# Altium PCB PCB1.PcbDoc
Units mil, origin at the board's own origin, x right, y up, seen from the top; angles counter-clockwise.
Board outline 2700 x 2100 mil, 2 copper layers (Top Layer, Bottom Layer), stack 62.8 mil thick; 14 components, 31 nets, 60 pads, 19 vias.
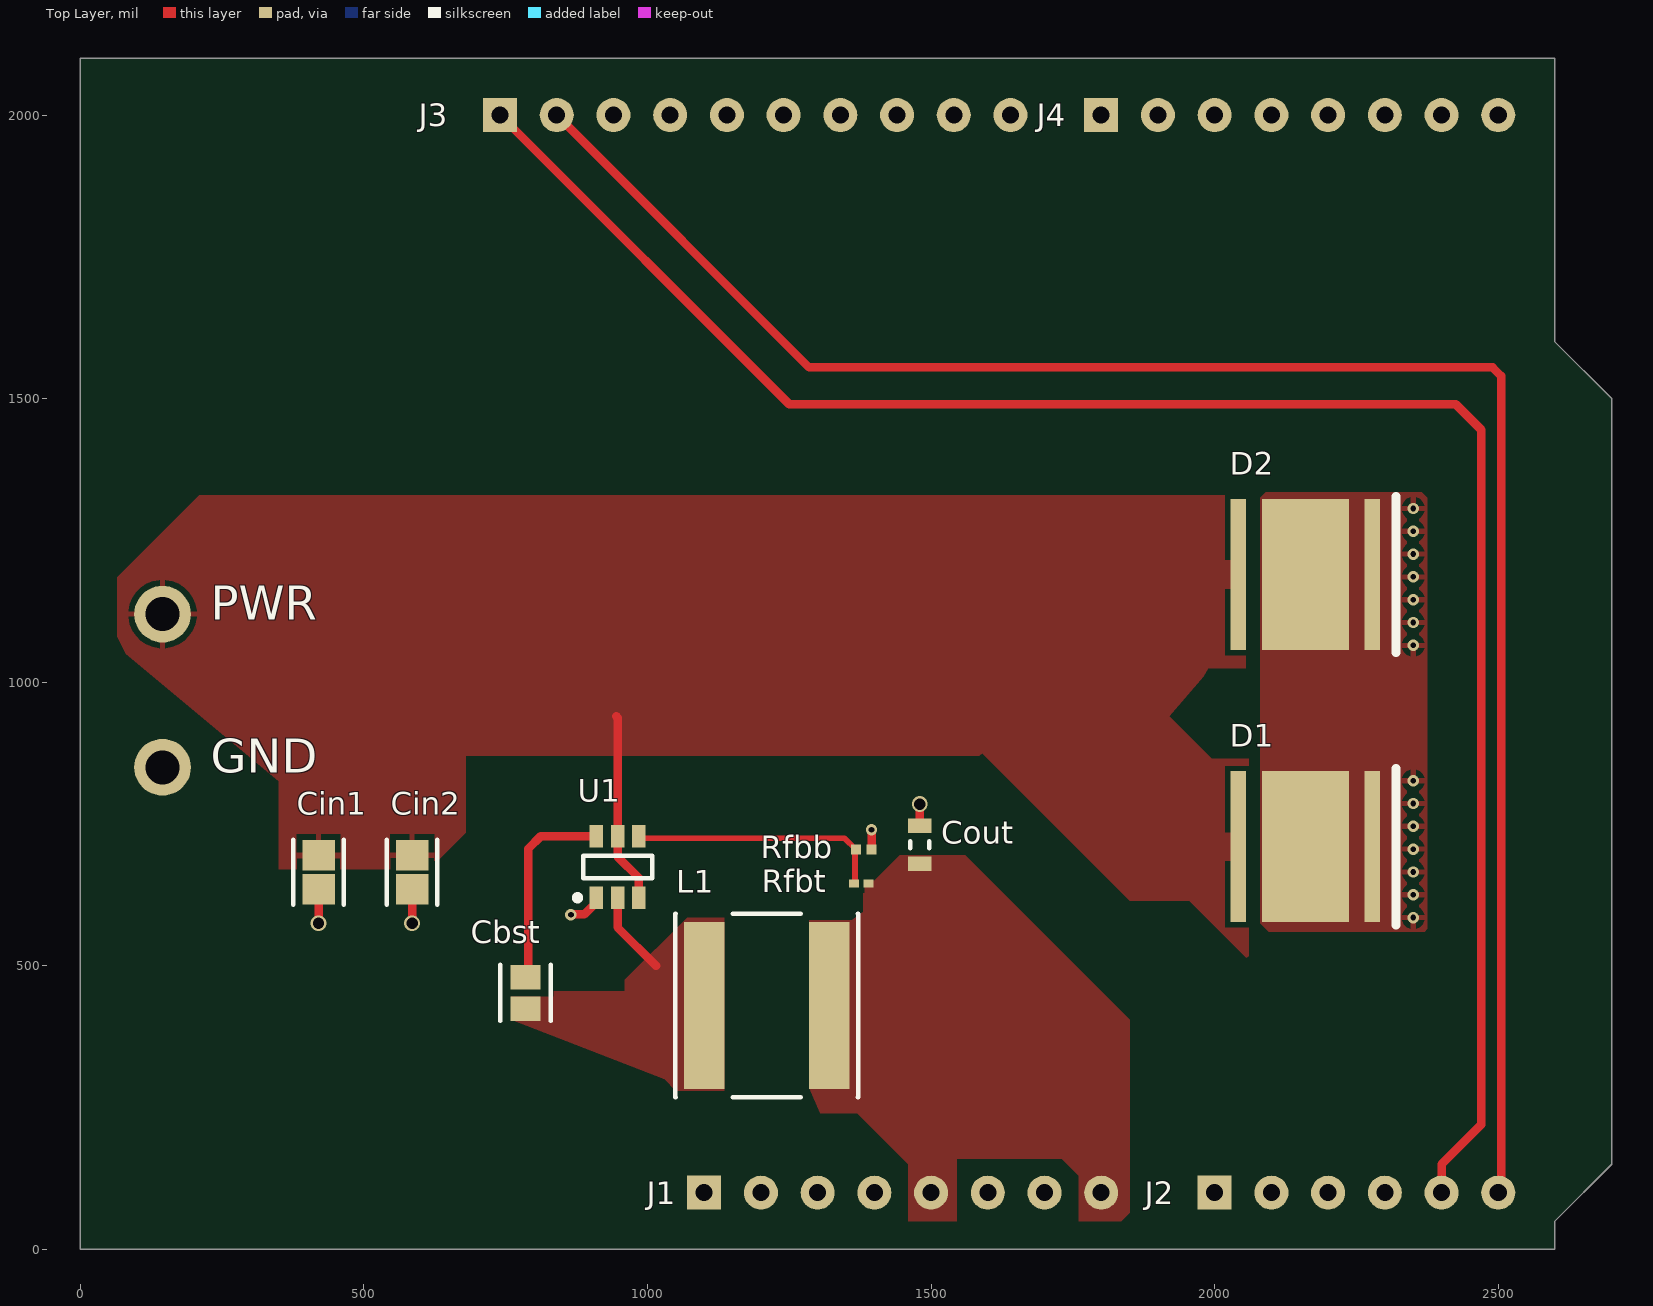
[diagram p0: Top Layer view]
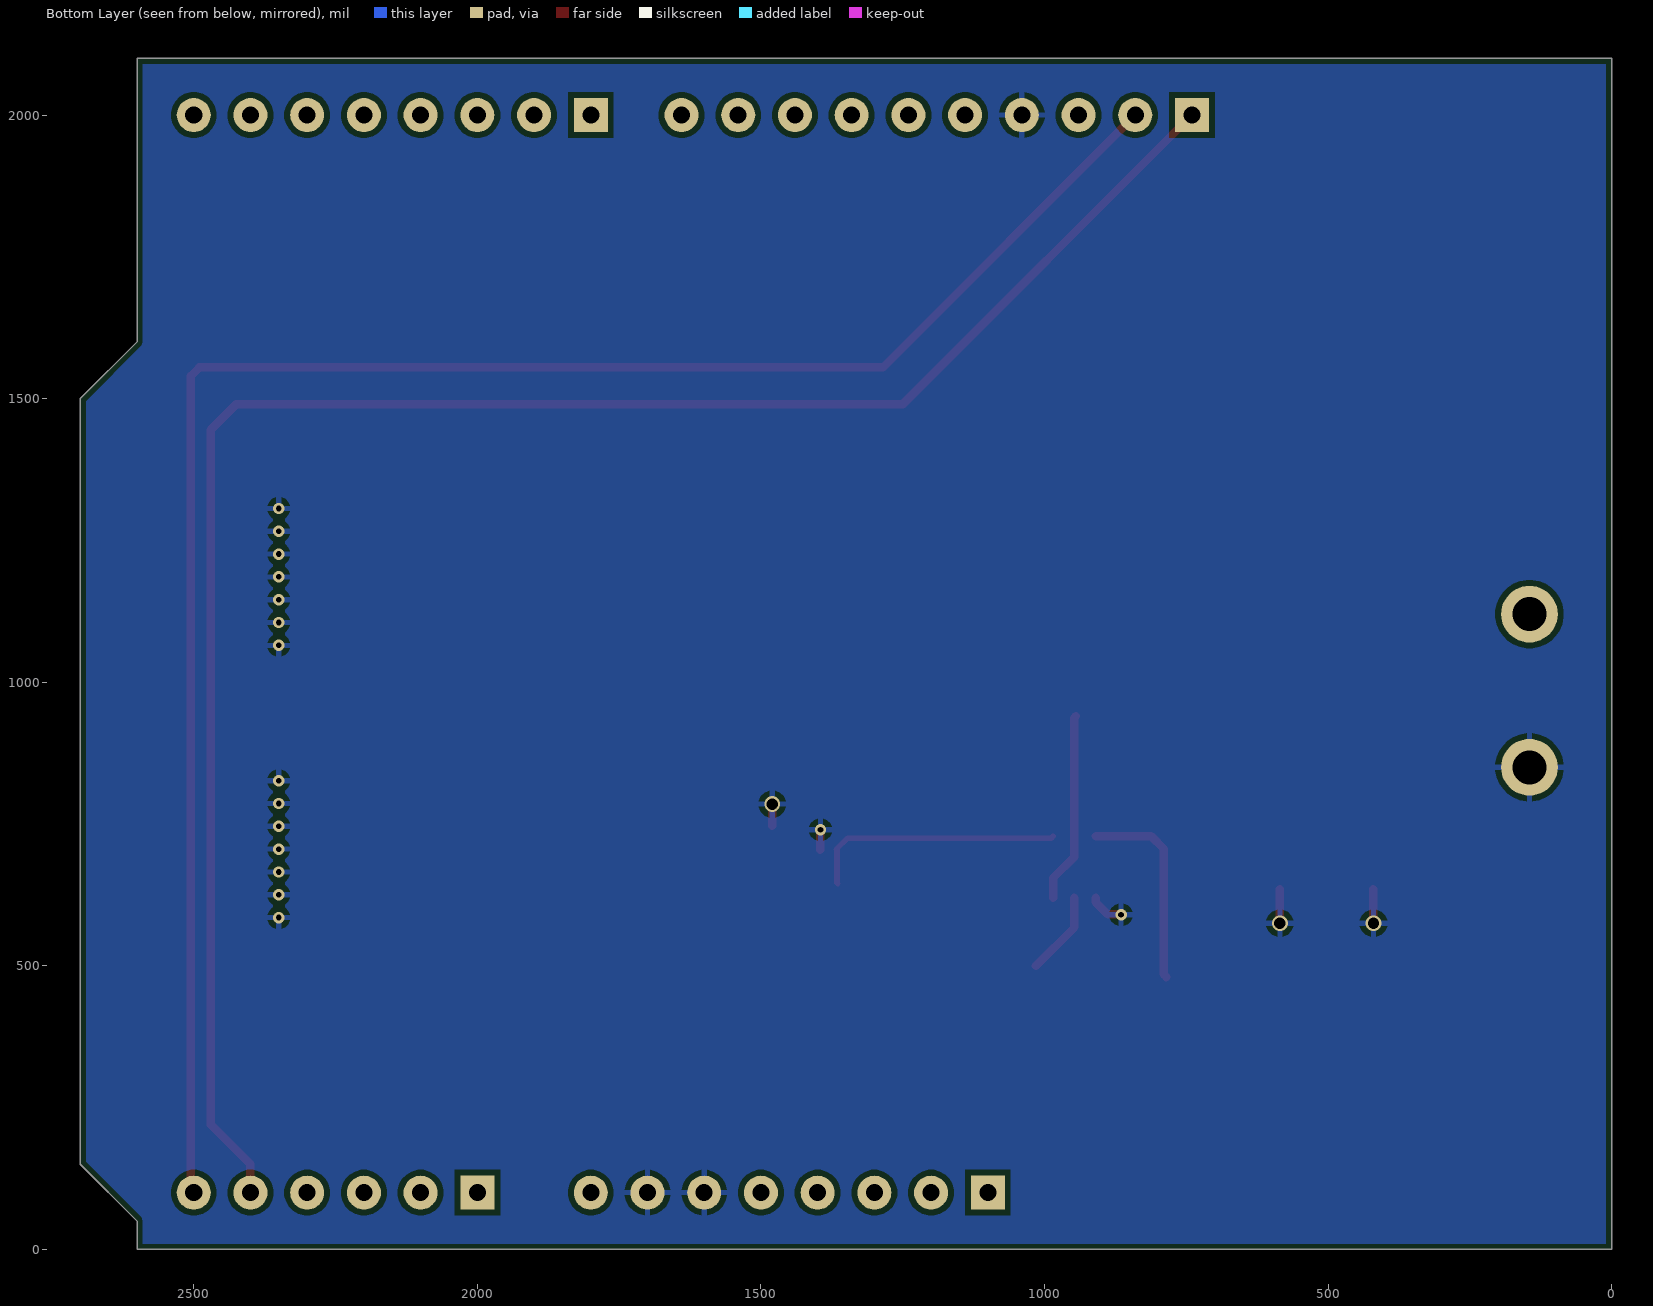
[diagram p1: Bottom Layer view, seen from below]

## Layer stack, top to bottom
Top Solder: solder mask 0.4, Solder Resist, Dk 3.5
Top Layer: signal copper 1.4
Dielectric 1: dielectric 60, FR-4, Dk 4.8
Bottom Layer: signal copper 1.4
Bottom Solder: solder mask 0.4, Solder Resist, Dk 3.5

## Board outline
0,0 0,2100 2600,2100 2600,1600 2700,1500 2700,150 2600,50 2600,0

## Design rules (kind name [scope] priority, off if disabled: settings)
BoardOutlineClearance [All] p1: gap=10 ignorepadtopadclearanceinfootprint=FALSE
Clearance [All] p1: gap=10 ignorepadtopadclearanceinfootprint=TRUE
MinimumSolderMaskSliver [All] p1: minsoldermaskwidth=5
PolygonConnect [All] p1: connectstyle=Relief reliefconductorwidth=10 reliefentries=4 polygonreliefangle="90 Angle" airgapwidth=10
RoutingVias [All] p1: holewidth=10 width=18 viastyle="Through Hole" minholewidth=6 minwidth=14 maxholewidth=28 maxwidth=50
SolderMaskExpansion [All] p1: expansion=0 istentingtop=FALSE
SupplyNets "Schematic Supply Nets_2" [InNet('+5')] p1: voltage=0.000
SupplyNets "Schematic Supply Nets_1" [InNet('GND')] p2: voltage=0.000
SupplyNets "Schematic Supply Nets" [InNet('+12')] p3: voltage=0.000
Width [All] p1: maxlimit=30 minlimit=5 preferedwidth=10
29 further rules are at their usual default settings.

## Components (designator, comment, footprint, x,y, rotation, side; value= is the part's Value field where it differs from the comment)
Cbst "100nF" FP-0805-L_2_01_0_2-W_1_25-IPC_C 785,452.21 r90 top
Cin1 "10uF" FP-C2012-125-0_2-IPC_B 420,664.92 r270 top
Cin2 "10uF" FP-C2012-125-0_2-IPC_B 585,665 r270 top
Cout "22uF" CAPC1608X100X20ML10 1480,713.46 r270 top
D1 "MKRAWT-00-0000-0D0HG235H" CREE-MK-R-2_V 2160,710 r0 top
D2 "MKRAWT-00-0000-0D0HG235H" CREE-MK-R-2_V 2160,1190 r0 top
J1 "8-Pin 100mils Connector" SSQ-108-03-T-S 1100,100 r0 top
J2 "6-Pin 100mils Connector" SSQ-106-03-T-S 2000,100 r0 top
J3 "10-Pin 100mils Connector" SSQ-110-03-T-S 740,2000 r0 top
J4 "8-Pin 100mils Connector" SSQ-108-03-T-S 1800,2000 r0 top
L1 "4.7uH" FP-NRS8030-MFG 1210.24,430 r0 top
Rfbb "10K" RESC0201(0603)_N 1381.22,705 r180 top value="10000.00 Ohm"
Rfbt "56.2K" RESC0603X28X15NL05T05 1377.2,645 r0 top
U1 "TPS562200DDCR" TPS562200DDCR 947.4,674.13 r90 top

## Footprints (in the part's own frame and the unit in brackets; to place one, negate y for a bottom-side part, rotate by r counter-clockwise, add the part's x,y. Pads: shape width x height; smd on the part's side, far side on the other; paste and mask are expansions set on the pad)
CAPC1608X100X20ML10 [mm] "Chip Capacitor, 2-Leads, Body 1.70x0.90mm, IPC Low Density"
  rect 0.65x1.05 smd: 1(-0.85,0) 2(0.85,0)
  silkscreen extent -0.15,-0.43 0.15,0.43, body extent -0.85,-0.45 0.85,0.45, height 1
CREE-MK-R-2_V [mm] "SMD, 2-Leads, Body 7x7mm, Thermal Pad 3.9x6.76mm"
  rect 0.7x6.76 smd: 1(-3,0) 2(3,0)
  rect 3.9x6.76 smd: 3(0,0)
  silkscreen extent 4.05,-3.5 4.05,3.5, body extent -3.5,-3.5 3.5,3.5, height 4.1
FP-0805-L_2_01_0_2-W_1_25-IPC_C [mil]
  rect 43.49x53.39 smd paste+0 mask+0: 1(-27.79,0) 2(27.79,0)
  silkscreen extent -50,-44 50,44, body extent -53,-32 53,32, height 10
FP-C2012-125-0_2-IPC_B [mil]
  rect 54.25x57.33 smd paste+0 mask+0: 1(-30.08,0) 2(30.08,0)
  silkscreen extent -57,-44 57,44, body extent -67,-39 67,39, height 10
FP-NRS8030-MFG [mm]
  rect 1.8x7.5 smd paste+0 mask+0: 1(-2.8,0) 2(2.8,0)
  silkscreen extent -4.1,-4.1 4.1,4.1, body extent -4.2,-4.2 4.2,4.2, height 0.25
RESC0201(0603)_N [mm] "Chip Resistor, Body 0.6x0.3mm, IPC Medium Density"
  rect 0.45x0.45 smd: 1(-0.35,0) 2(0.35,0)
  body extent -0.31,-0.16 0.31,0.16, height 0.3
RESC0603X28X15NL05T05 [mm] "Chip Resistor, 2-Leads, Body 0.60x0.30mm, IPC Medium Density"
  rect 0.45x0.35 smd: 1(-0.325,0) 2(0.325,0)
  body extent -0.33,-0.17 0.33,0.18, height 0.28
SSQ-106-03-T-S [mil]
  rect 60x60 hole 30: 1(0,0)
  round 60 hole 30: 2(100,0) 3(200,0) 4(300,0) 5(400,0) 6(500,0)
SSQ-108-03-T-S [mil] "8-Pin Arduino Connector"
  rect 60x60 hole 30: 1(0,0)
  round 60 hole 30: 2(100,0) 3(200,0) 4(300,0) 5(400,0) 6(500,0) 7(600,0) 8(700,0)
SSQ-110-03-T-S [mil]
  rect 60x60 hole 30: 1(0,0)
  round 60 hole 30: 2(100,0) 3(200,0) 4(300,0) 5(400,0) 6(500,0) 7(600,0) 8(700,0) 9(800,0) 10(900,0)
TPS562200DDCR [mm]
  rect 1x0.6 smd: 1(-1.375,0.95) 2(-1.375,0) 3(-1.375,-0.95) 4(1.375,-0.95) 5(1.375,0) 6(1.375,0.95)
  silkscreen extent -1.5,-1.55 0.5,1.92, body extent -0.88,-1.52 0.87,1.53, height 1.1

## Part data
Cbst: library part CMP-2000-05014-2, "General Purpose Ceramic Capacitor, 0805, 100nF, 10%, X7R, 0.15, 25V", Case Code (Imperial)=0805, Case Code (Metric)=2012, Dielectric=X7R, Insulation Resistance=100GR, Max Operating Temperature=125°C, Min Operating Temperature=-55°C, Package Quantity=1, Tolerance=10%, Voltage=25V, Capacitance=100nF, Case/Package=0805, Construction=Flat, Contact Plating=Tin, Depth=1.25mm, Dissipation Factor=3%, Height=0.94mm, Lead Free="Lead Free", Length=2.01mm, Mount="Surface Mount", Number of Pins=2, Packaging="Tape and Reel", Radiation Hardening=No, REACH SVHC="No SVHC", RoHS Compliant=Yes, Series=-, Termination=SMD/SMT, Thickness=0.037inch, Voltage Rating=25V, Voltage Rating (DC)=25V, Width=0.049inch
Cin1 Cin2: library part CMP-08246-003791-1, "Multilayer Ceramic Capacitors 10μF ±20% 35V X5R SMD 0805", Case Code (Imperial)=0805, Case Code (Metric)=2012, Dielectric Material=Ceramic, Max Operating Temperature=85°C, Min Operating Temperature=-55°C, Package Quantity=2000, Tolerance=20%, Voltage Rating=35V, Capacitance=10uF, Case/Package=0805, Lead Free="Lead Free", Length=0.079inch, Mount="Surface Mount", Packaging="Tape and Reel", RoHS Compliant=Yes, Series=C, Thickness=0.057inch, Voltage Rating (DC)=35V, Width=0.049inch
Cout: library part CMP-2000-05441-1, "Chip Capacitor, 22 uF, +/- 20%, 10 V, -55 to 85 degC, 0603 (1608 Metric), RoHS, Tape and Reel", Capacitance=22µF, Manufacturer=TDK, Operating Temperature=-55degC~85degC, Package / Case=0603(1608Metric), Package Description="2-Pin Surface Mount Device, Body 1.6 x 0.8 mm", Package Reference=603, PCN Part Number=MLCCPartNumberChange30/Nov/2012, Ratings=-, Standard Package=1, Temperature Coefficient=X5R, Tolerance=±20%, Voltage - Rated=10V, Applications=GeneralPurpose, Category=Capacitors, Datasheet URL=http://download.siliconexpert.com/pdfs/2015/4/21/15/54/45/779/tdk_/manual/37024850441143360mlcc_commercial_general_en.pdf, Datasheet Version=Mar-15, Design Resources=20WNon-IsolatedBuckLEDDriverUsingPLLNK460KG, Family=CeramicCapacitors, Features=-, Height - Seated (Max)=-, Kits=445-9014-KIT-ND-KITMLCC100PF-22UF060310-50V, Lead Spacing=-, Lead Style=-, Manufacturer URL=http://www.tdk.com/, Mounting Type=SurfaceMount,MLCC, Online Catalog=CSeries,GeneralPurpose, Other Names=445-9077-1, Packaging=CutTape(CT), Product Training Modules=CSeriesGeneralApplicationsSEAT,CCV,andTVCLDesignToolsGuidetoReplacinganElectrolyticCapacitorwithanMLCC, RoHS Information=RoHSCertificate-MLCC, Series=C, Size / Dimension="0.063\"Lx0.031\"W(1.60mmx0.80mm)", Thickness (Max)="0.035\"(0.90mm)"
D1 D2: library part CMP-2100-00977-1, "LED, White, 12 V, 2-Pin SMD, RoHS, Tape and Reel"
J1 J4: library part SSQ-108-03-T-S, "8-Pin Arduino Connector"
J2: library part SSQ-106-03-T-S, "6-Pin Arduino Connector"
J3: library part SSQ-110-03-T-S, "10-Pin Arduino Connector"
L1: library part CMP-14484-001135-1, "Inductor Power Shielded Wirewound 4.7uH 20% 100KHz Ferrite 3.6A 28.6mΩ DCR T/R", Case/Package=8030, Current Rating=4A, DC Resistance (DCR)=28.6mR, Inductance Tolerance=20%, Max DC Current=3.6A, Max Operating Temperature=125°C, Min Operating Temperature=-25°C, Package Quantity=1000, Resistor Type=Wirewound, Self Resonant Frequency=40MHz, Test Frequency=100kHz, Core Material=Ferrite, Depth=8.2mm, Halogen Free="Halogen Free", Height=3mm, Height - Seated (Max)=0.118inch, Inductance=4.7uH, Lead Free="Lead Free", Lead Pitch=5.6mm, Length=8mm, Mount="Surface Mount", Number of Pins=2, Packaging="Tape and Reel", Radiation Hardening=No, RMS Current (Irms)=4A, RoHS Compliant=Yes, Saturation Current=3.6A, Series=NRS, Shielding=Shielded, Termination=SMD/SMT, Tolerance=20%, Width=0.315inch
Rfbb: library part CMP-1010-00529-1, "10K 0.05W 1% 0201 (0603 Metric)  SMD", Case-EIA=0201, Case-Metric=0603, Power="0.05 W", Tolerance="1 %", Technology=SMT
Rfbt: library part CMP-2004-00723-1, Manufacturer="Vishay Dale", Part Number=CRCW020156K2FNED

## Free pads (board coordinates)
  round 100 hole 60: 34(145,850) 34(145,1120)

## Via types
v1: diameter 20, hole 10, Top Layer to Bottom Layer, 16 vias
v2: diameter 28, hole 20, Top Layer to Bottom Layer, 3 vias

## Nets (pads, with @x,y where several pads share a name; then routed paths per layer and width w, separated by ;. In a path a pad name is that pad's centre, name@x,y a point inside that pad or via, vN(x,y) a via of type N, cw(c..) or ccw(c..) an arc to the next point about the centre after c; other vN are vias at no path point)
3.3V: J1.4
+5: Cout.2 J1.5 J1.8 L1.2 Rfbt.2
+12: Cin1.1 Cin2.1 D1.1 D2.1 pad.34@145,1120 U1.3 U1.5 | length 336.5
  Top Layer w15: 945,940 947.4,937.6 U1.5 947.4,692.31 984.8,654.91 U1.3
A0: J2.1
A1: J2.2
A2: J2.3
A3: J2.4
A4: J2.5 J3.1 | length 3333.9
  Top Layer w15: J3.1 1250,1490 2425,1490 2470,1445 2470,220 2400,150 J2.5
A5: J2.6 J3.2 | length 3297.6
  Top Layer w15: J3.2 1285,1555 2490,1555 2505,1540 2505,105 J2.6
AREF: J3.3
D0: J4.8
D1: J4.7
D2: J4.6
D3: J4.5
D4: J4.4
D5: J4.3
D6: J4.2
D7: J4.1
D8: J3.10
D9: J3.9
D10: J3.8
D11: J3.7
D12: J3.6
D13: J3.5
GND: Cin1.2 Cin2.2 Cout.1 D1.2 D1.3 D2.2 D2.3 J1.6 J1.7 J3.4 pad.34@145,850 Rfbb.1 U1.1 | length 254.9
  Top Layer w15: v2(420,575) Cin1.2 ; v2(585,575) Cin2.2 ; v1(865,590) 865.96,590.96 888.83,590.96 910,612.13 U1.1 ; Rfbb.1 v1(1395,740) ; Cout.1 v2(1480,785)
  other v1: 2350,585 2350,625.23 2350,665.45 2350,705.68 2350,745.9 2350,786.13 2350,826.35 2350,1065 2350,1105.23 2350,1145.45 2350,1185.68 2350,1225.9 2350,1266.13 2350,1306.35
IOREF: J1.2
N-C: J1.1
NetCbst_2: Cbst.2 U1.6 | length 357.6
  Top Layer w15: Cbst.2 790,485 790,706.54 811.73,728.27 U1.6
NetRfbb_2: Rfbb.2 Rfbt.1 U1.4 | length 453.5
  Top Layer w10: U1.4 988.07,725 1347.44,725 Rfbb.2 1365.93,703.48 1365.93,646.52 Rfbt.1
RESET: J1.3
SW_OUT: Cbst.1 L1.1 U1.2 | length 148
  Top Layer w15: U1.2 947.4,567.6 1015,500

## Polygon pours and split planes (outlines as drawn)
GND on Bottom Layer "GND_L02_P000" (solid, pour order 0): 0,0 2600,0 2600,50 2700,150 2700,1500 2600,1600 2600,2100 0,2100
+5 on Top Layer "+5_L01_P005" (solid, pour order 5): 1285,285 1285,580 1355,580 1360,580 1380,595 1380,650 1400,650 1445,695 1560,695 1850,405 1850,65 1835,50 1760,50 1760,130 1730,160 1545,160 1545,50 1540,50 1530,50 1460,50 1460,150 1370,240 1305,240
SW_OUT on Top Layer "SW_OUT_L01_P004" (solid, pour order 4): 760,405 760,445 835,445 835,455 960,455 960,475 1070,585 1135,585 1135,280 1050,280 1030,300
+12 on Top Layer "+12_L01_P003" (solid, pour order 3): 1920,940 1995,865 2060,865 2060,510 1955,615 1850,615 1590,875 1585,870 680,870 680,735 615,670 350,670 350,825 80,1050 65,1080 65,1185 210,1330 2055,1330 2055,1065 2055,1050 2055,1025 1989,1025 1980,1010
GND on Top Layer "GND_L01_P001" (solid, pour order 1): 2080,1325 2080,575 2095,560 2370,560 2375,565 2375,1325 2365,1335 2090,1335

## Silkscreen, mask and mechanical layers (free items; w line width, h text height)
Top Overlay:
  text "PWR" at 230,1110 h60
  text "GND" at 230,840 h60